# Altium PCB ECG_Main.PcbDoc
Units mm, origin at the board's own origin, x right, y up, seen from the top; angles counter-clockwise.
Board outline 62 x 109.5 mm, 2 copper layers (Top Layer, Bottom Layer); 50 components, 38 nets, 198 pads, 8 vias.
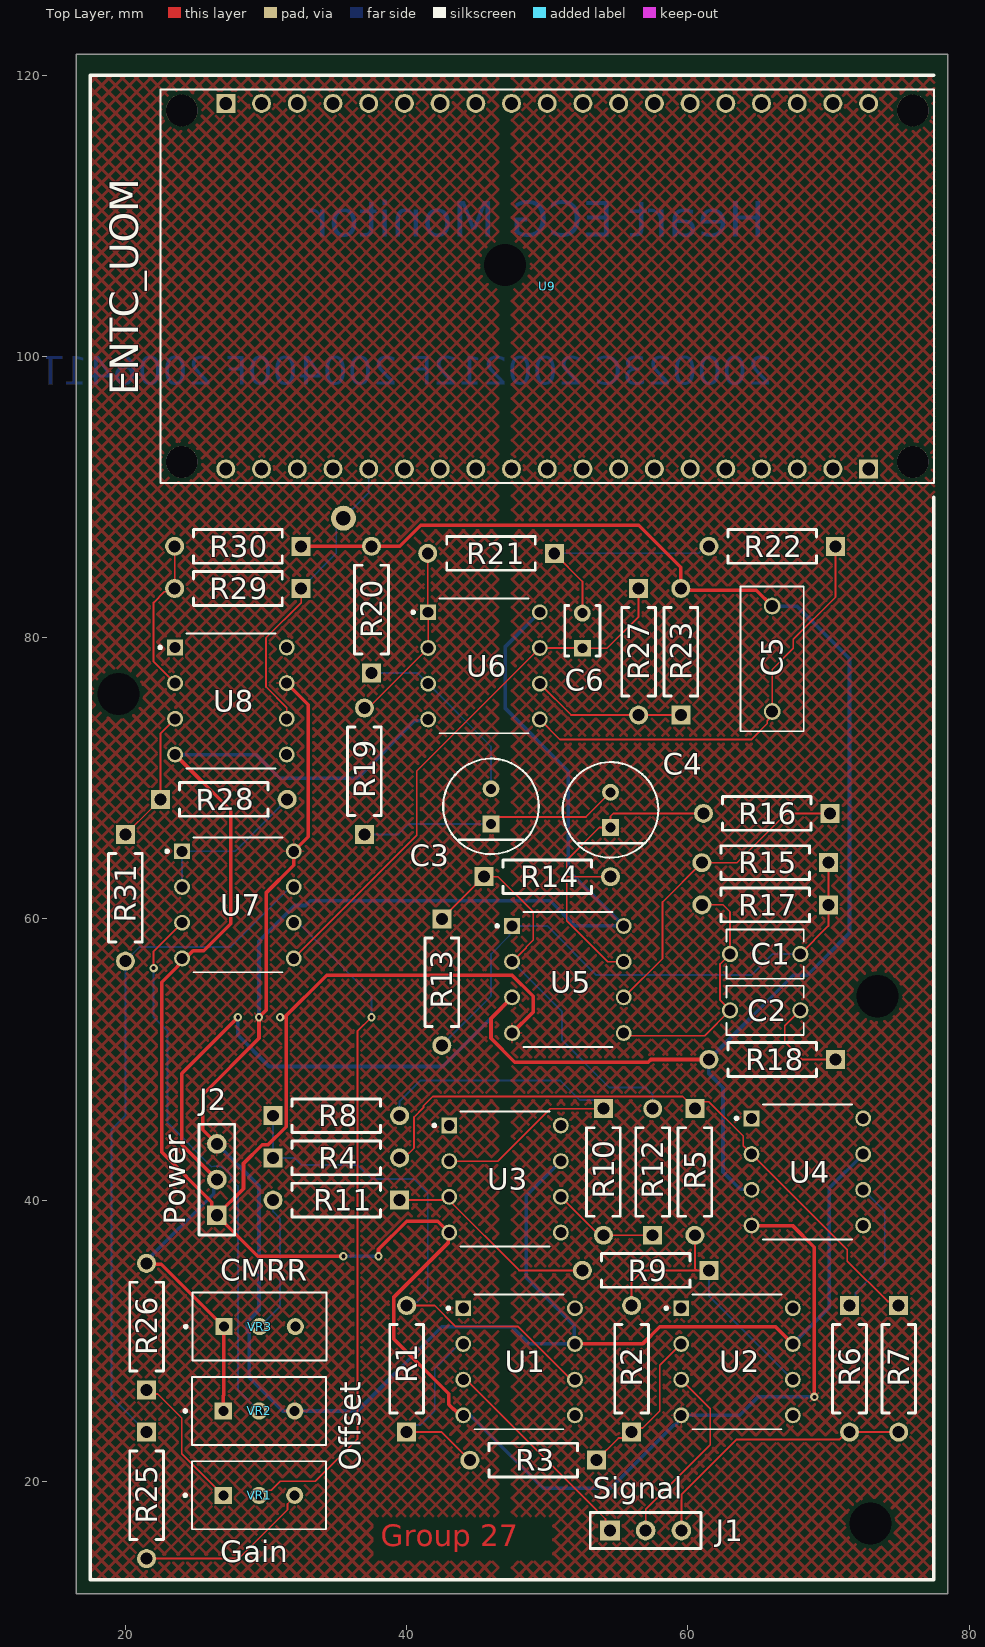
[diagram p0: Top Layer view]
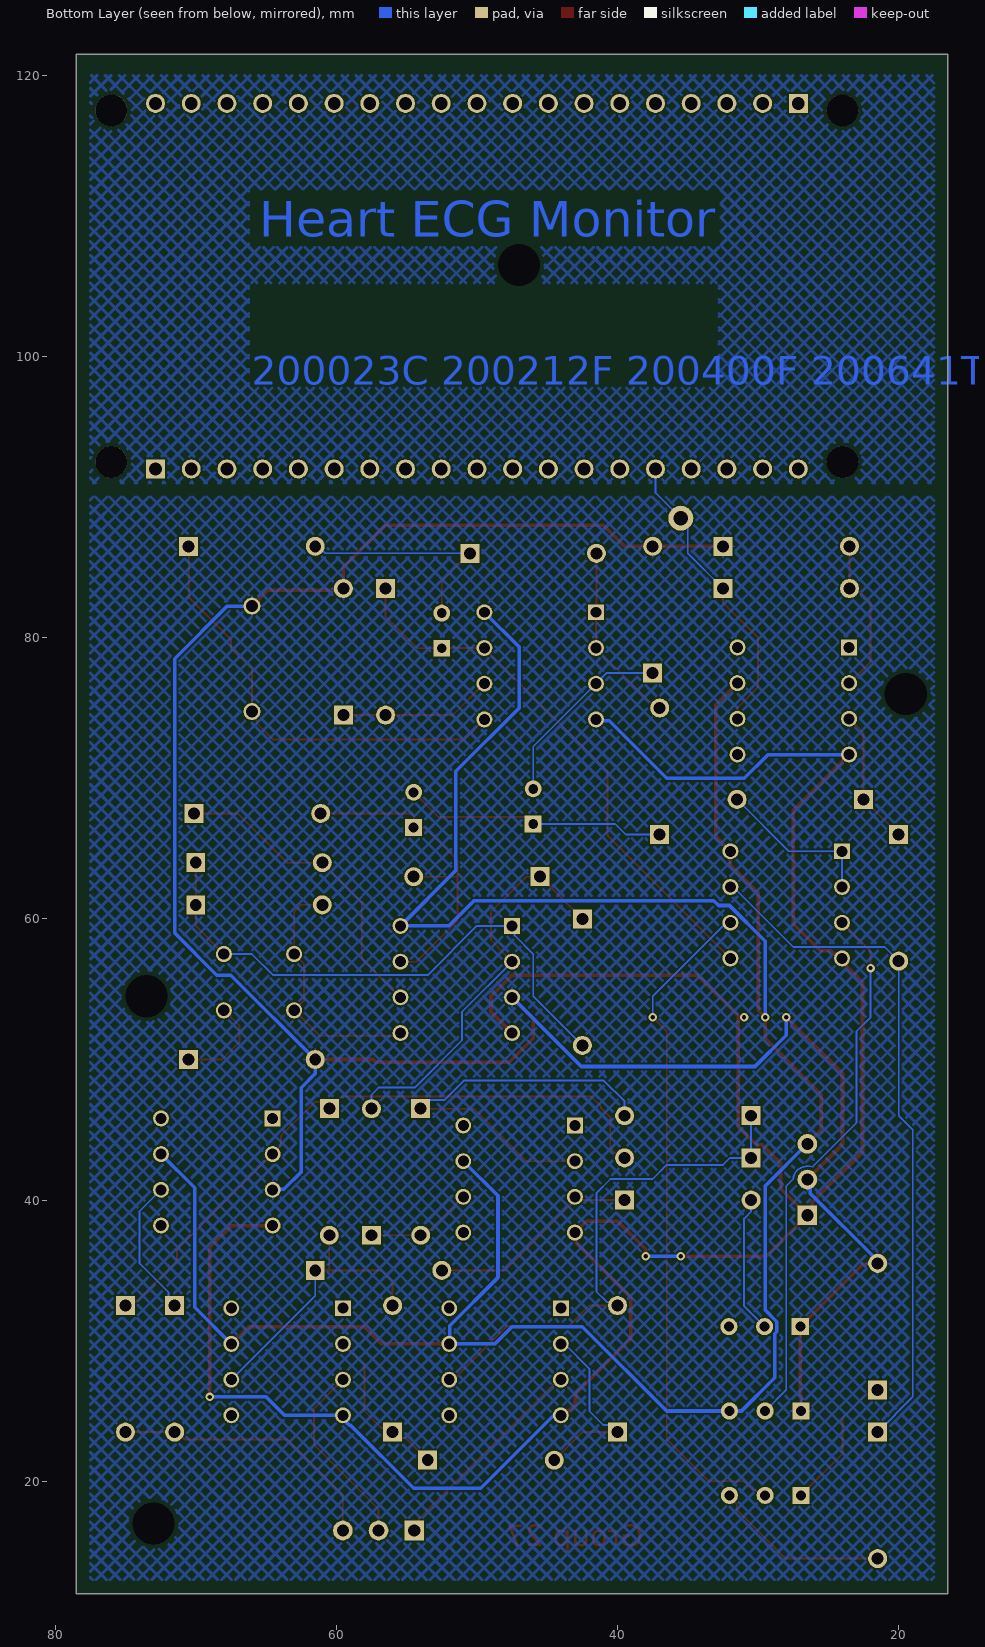
[diagram p1: Bottom Layer view, seen from below]

## Layer stack, top to bottom
Top Solder: solder mask 0.0102, Solder Resist, Dk 3.5
Top Layer: signal copper 0.0356
Dielectric 1: dielectric 0.32, FR-4, Dk 4.8
Bottom Layer: signal copper 0.0356
Bottom Solder: solder mask 0.0102, Solder Resist, Dk 3.5

## Board outline
16.5,12 78.5,12 78.5,121.5 16.5,121.5

## Design rules (kind name [scope] priority, off if disabled: settings)
BoardOutlineClearance [All] p1: gap=0.2 ignorepadtopadclearanceinfootprint=FALSE
Clearance [All] p1: gap=0.127 ignorepadtopadclearanceinfootprint=FALSE except(0.25: Arc-Hole Track-Hole SMDPad-Hole THPad-Hole Via-Hole Fill-Hole Poly-Hole Region-Hole Text-Hole)
ComponentClearance [All] p1: gap=0.127 collisioncheckmode=3 verticalgap=0.127 showdistances=TRUE
DiffPairsRouting [All] p1: maxlimit=0.254 minlimit=0.127 mostfreqgap=0.127 toplayer_minwidth=0.127 toplayer_maxwidth=25.4 toplayer_prefwidth=0.127 bottomlayer_minwidth=0.127 bottomlayer_maxwidth=25.4 bottomlayer_prefwidth=0.127 maxuncoupledlength=12.7
Height [All] p1: minheight=0 maxheight=1816.048 prefheight=12.7
HoleSize [All] p1: absolutevalues=TRUE maxlimit=6.3 minlimit=0.3 maxpercent=80.000 minpercent=20.000
HoleToHoleClearance [All] p1: gap=0.25 allowstackedmicrovias=FALSE
MinimumAnnularRing [All] p1: minimumring=0.076
MinimumSolderMaskSliver [All] p1: minsoldermaskwidth=0
PlaneClearance [All] p1: clearance=0.127
PlaneConnect PlaneConnectPowerPads [InPadClass('PowerPads')] p1: planeconnectstyle=Direct reliefexpansion=0.508 reliefentries=4 reliefconductorwidth=0.254 reliefairgap=0.254
PlaneConnect [All] p2: pad.planeconnectstyle=Relief pad.reliefexpansion=0.3 pad.reliefentries=4 pad.reliefconductorwidth=0.127 pad.reliefairgap=0.127 via.planeconnectstyle=Direct via.reliefexpansion=0.3 via.reliefentries=4 via.reliefconductorwidth=0.127 via.reliefairgap=0.127
PolygonConnect PolygonConnectPowerPads [All vs (InPadClass('PowerPads'))] p1: connectstyle=Direct reliefconductorwidth=0.254 reliefentries=4 polygonreliefangle="90 Angle" airgapwidth=0.254
PolygonConnect [All] p2: thpad.connectstyle=Relief thpad.reliefconductorwidth=0.127 thpad.reliefentries=4 thpad.polygonreliefangle="90 Angle" thpad.airgapwidth=0.127 smdpad.connectstyle=Relief smdpad.reliefconductorwidth=0.127 smdpad.reliefentries=4 smdpad.polygonreliefangle="90 Angle" smdpad.airgapwidth=0.127 via.connectstyle=Relief via.reliefconductorwidth=0.127 via.reliefentries=4 via.polygonreliefangle="45 Angle" via.airgapwidth=0.127
RoutingVias [All] p1: holewidth=0.3 width=0.6 viastyle="Through Hole" minholewidth=0.3 minwidth=0.6 maxholewidth=0.6 maxwidth=6.6
SilkToSilkClearance [All] p1: silktosilkclearance=0
SilkToSolderMaskClearance [IsPad] p1: minsilkscreentomaskgap=0.127 clearancetoexposedcopper=TRUE
SolderMaskExpansion [All] p1: expansion=0.075 istentingtop=FALSE
Width Width_1 [InNet('+6V') or InNet('-6V') or InNet('GND')] p1: maxlimit=0.254 minlimit=0.254 preferedwidth=0.254
Width [All] p2: maxlimit=25.4 minlimit=0.127 preferedwidth=0.127 minimp=50.000000 maximp=50.000000 favimp=50.000000
20 further rules are at their usual default settings.

## Components (designator, comment, footprint, x,y, rotation, side; value= is the part's Value field where it differs from the comment)
C1 "0.68uF" CAPRB500W50L550T350H600 65.5,57.5 r180 top
C2 "0.68uF" CAPRB500W50L550T350H600 65.5,53.5 r0 top
C3 "100uF" FP-RAD-TH-D_6_3_0_5-L_11-MFG 46,68 r90 top
C4 "100uF" FP-RAD-TH-D_6_3_0_5-L_11-MFG 54.5,67.75 r90 top
C5 "68nF" CAPRR750W60L1030T450H750 66,78.5 r90 top
C6 "47nF" FP-RCE0DB-MFG 52.5,80.5 r90 top
J1 "SIGNAL_IN" SMTC-SLW-103-01-X-S 54.46,16.5 r0 top
J2 "POWER_IN" SMTC-SLW-103-01-X-S 26.5,38.92 r90 top
R1 "100k" RESA60-630X240 40,28 r90 top
R2 "100k" RESA60-630X240 56,28 r90 top
R3 "10k" RESA60-630X240 49,21.5 r180 top
R4 "56k" RESA60-630X240 35,43 r0 top
R5 "56k" RESA60-630X240 60.5,42 r270 top
R6 "3M" RESA60-630X240 71.5,28 r270 top
R7 "3M" RESA60-630X240 75,28 r270 top
R8 "8.2k" RESA60-630X240 35,46 r0 top
R9 "8.2k" RESA60-630X240 57,35 r180 top
R10 "43k" RESA60-630X240 54,42 r270 top
R11 "33k" RESA60-630X240 35,40 r180 top
R12 "6.8k" RESA60-630X240 57.5,42 r90 top
R13 "47k" RESA60-630X240 42.5,55.5 r270 top
R14 "8.2k" RESA60-630X240 50,63 r0 top
R15 "100k" RESA60-630X240 65.5,64 r180 top
R16 "200k" RESA60-630X240 65.612,67.5 r180 top
R17 "4.7k" RESA60-630X240 65.5,61 r180 top
R18 "4.7k" RESA60-630X240 66,50 r180 top
R19 "15k" RESA60-630X240 37,70.5 r90 top
R20 "33k" RESA60-630X240 37.5,82 r90 top
R21 "24k" RESA60-630X240 46,86 r180 top
R22 "15k" RESA60-630X240 66,86.5 r180 top
R23 "10k" RESA60-630X240 59.5,79 r90 top
R25 "5.1k" RESA60-630X240 21.5,19 r270 top
R26 "5.1k" RESA60-630X240 21.5,31 r90 top
R27 "10k" RESA60-630X240 56.5,79 r270 top
R28 "10k" RESA60-630X240 27,68.5 r0 top
R29 "10k" RESA60-630X240 28,83.5 r180 top
R30 "10k" RESA60-630X240 28,86.5 r180 top
R31 "10k" RESA60-630X240 20,61.5 r270 top
U1 "OP07CP" DIP794W45P254L959H508Q8 48,28.5 r0 top
U2 "OP07CP" DIP794W45P254L959H508Q8 63.5,28.5 r0 top
U3 "OP07CP" DIP794W45P254L959H508Q8 47,41.5 r0 top
U4 "OP07CP" DIP794W45P254L959H508Q8 68.5,42 r0 top
U5 "TL072BCP" DIP794W45P254L959H508Q8 51.47,55.69 r0 top
U6 "TL072BCP" DIP794W45P254L959H508Q8 45.5,78 r0 top
U7 "TL072BCP" DIP794W45P254L959H508Q8 28,61 r0 top
U8 "OP07CP" DIP794W45P254L959H508Q8 27.5,75.5 r0 top
U9 "ESP32_NODEMCU" MODULE_ESP32_NODEMCU 50,105 r90 top
VR1 "100k" TRIM_3296W-OT1-103 29.5,19 r0 top
VR2 "100k" TRIM_3296W-OT1-103 29.5,25 r0 top
VR3 "20k" TRIM_3296W-OT1-103 29.54,31 r0 top

## Footprints (in the part's own frame and the unit in brackets; to place one, negate y for a bottom-side part, rotate by r counter-clockwise, add the part's x,y. Pads: shape width x height; smd on the part's side, far side on the other; paste and mask are expansions set on the pad)
CAPRB500W50L550T350H600 [mm]
  round 1.15 hole 0.8: 1(-2.5,0) 2(2.5,0)
  silkscreen extent -2.75,-1.75 2.75,1.75, body extent -2.75,-1.75 2.75,1.75, height 3
CAPRR750W60L1030T450H750 [mm]
  round 1.2 hole 0.85: 1(-3.75,0) 2(3.75,0)
  silkscreen extent -5.15,-2.25 5.15,2.25, body extent -5.15,-2.25 5.15,2.25, height 8.5
DIP794W45P254L959H508Q8 [mm]
  rect 1.13x1.13 hole 0.78: 1(-3.97,3.81)
  round 1.13 hole 0.78: 2(-3.97,1.27) 3(-3.97,-1.27) 4(-3.97,-3.81) 5(3.97,-3.81) 6(3.97,-1.27) 7(3.97,1.27) 8(3.97,3.81)
  silkscreen extent -5.13,-4.79 3.17,4.79, body extent -3.94,-4.79 3.94,4.79, height 5.08
FP-RAD-TH-D_6_3_0_5-L_11-MFG [mm]
  rect 1.2x1.2 hole 0.7 paste-1000 mask+0: 1(-1.25,0)
  round 1.2 hole 0.7 paste-1000 mask+0: 2(1.25,0)
  silkscreen extent -3.4,-3.4 3.4,3.4, body extent -3.5,-3.5 3.5,3.5, height 0.25
FP-RCE0DB-MFG [mm]
  rect 1.2x1.2 hole 0.7 paste-1000 mask+0: 1(-1.25,0)
  round 1.2 hole 0.7 paste-1000 mask+0: 2(1.25,0)
  silkscreen extent -1.8,-1.25 1.8,1.25, body extent -1.95,-1.35 1.95,1.35, height 0.25
MODULE_ESP32_NODEMCU [mm]
  rect 1.35x1.35 hole 0.9: J4_1(13,22.86) J5_1(-13,-22.86)
  round 1.35 hole 0.9: J4_2(13,20.32) J4_3(13,17.78) J4_4(13,15.24) J4_5(13,12.7) J4_6(13,10.16) J4_7(13,7.62) J4_8(13,5.08) J4_9(13,2.54) J4_10(13,0) J4_11(13,-2.54) J4_12(13,-5.08) J4_13(13,-7.62) J4_14(13,-10.16) J4_15(13,-12.7) J4_16(13,-15.24) J4_17(13,-17.78) J4_18(13,-20.32) J4_19(13,-22.86) J5_2(-13,-20.32) J5_3(-13,-17.78) J5_4(-13,-15.24) J5_5(-13,-12.7) J5_6(-13,-10.16) J5_7(-13,-7.62) J5_8(-13,-5.08) J5_9(-13,-2.54) J5_10(-13,0) J5_11(-13,2.54) J5_12(-13,5.08) J5_13(-13,7.62) J5_14(-13,10.16) J5_15(-13,12.7) J5_16(-13,15.24) J5_17(-13,17.78) J5_18(-13,20.32) J5_19(-13,22.86)
  round 2.25 hole 2.25 unplated: ""(-12.5,26) ""(-12.5,-26) ""(12.5,26) ""(12.5,-26)
  silkscreen extent -14,-27.5 14,27.5
RESA60-630X240 [mm] "Axial Resistor, 2-Leads, Dia 2.4mm, Body Length 6.3mm"
  rect 1.35x1.35 hole 0.85: 1(-4.5,0)
  round 1.35 hole 0.85: 2(4.5,0)
  silkscreen extent -3.15,-1.2 3.15,1.2, body extent -4.77,-1.19 4.77,1.2, height 2.4
SMTC-SLW-103-01-X-S [mm] "Low Profile Socket Strip, 1x3 Pins, Vertical, 2.54mm Pitch, Female"
  rect 1.4x1.4 hole 0.86: 1(0,0)
  round 1.4 hole 0.86: 2(2.54,0) 3(5.08,0)
  silkscreen extent -1.4,-1.27 6.48,1.27, body extent -1.27,-1.27 6.35,1.27, height 4.57
TRIM_3296W-OT1-103 [mm]
  rect 1.218x1.218 hole 0.71: 1(-2.54,0)
  round 1.218 hole 0.71: 2(0,0) 3(2.54,0)
  silkscreen extent -5.35,-2.41 4.76,2.42, body extent -4.76,-2.41 4.76,2.42, height 11.55

## Part data
C1 C2: library part FA26NP02J472JNU06, Package=None, Availability=Unavailable, MF="{'manufacturer': u'TDK'}", MP=FA26NP02J472JNU06, Price=None
C3 C4: library part CMP-001-00083-1, "Cap Aluminum Lytic 100uF 25V 20% (6.3 X 11.2mm) Radial 2.5mm 130mA 1000h 105°C Ammo Pack"
C5: library part ECQE2683JF, Package=None, Availability=Unavailable, MF="{'manufacturer': u'Panasonic'}", MP=ECQE2683JF, Price=None
C6: library part CMP-001-00084-1, "Cap Ceramic 470pF 50V C0G 5% Radial 2.5mm 125°C Ammo Pack"
J1 J2: library part CMP-1023-00128-1, "Low Profile Socket Strips, Through-hole, Vertical, -55 to 125 degC, 2.54 mm Pitch, 3-Pin, Female, RoHS", Manufacturer=Samtec, PartNumber=SLW-103-01-G-S, Temperature Range="-55 to 125 degC", ComponentLink1Description="Manufacturer URL", ComponentLink1URL=http://www.samtec.com, ComponentLink2Description=Datasheet, ComponentLink2URL=http://www.samtec.com/documents/webfiles/pdf/SLW.PDF, ComponentLink3Description="Package Specification", ComponentLink3URL=http://www.samtec.com/documents/webfiles/cpdf/SLW-1XX-01-X-X-MKT.pdf, DatasheetVersion=F-214, Mounting Technology=Through-hole, Orientation=Vertical, PackageDescription="Low Profile Socket Strip", PackageReference=SLW-103-01-X-S, PackageVersion="X, 9/1987", Pitch="2.54 mm", RoHS=True
R1 R2: library part CMP-009-00045-4, "Axial Resistor, 100 KOhm, +/- 1%, 0.25 W, -55 to 155 degC, 2-Pin THD, RoHS, Bulk", Case/Package=Axial, Manufacturer=Yageo, Max Operating Temperature=155°C, Min Operating Temperature=-55°C, Package Description="2-Pin Axial Lead, Dia 2.4 mm, Body Length 6.3 mm", Package Quantity=200, Package Reference=MFR-25, Power=250mW, Tolerance=1%, Voltage Rating=250V, Datasheet URL=http://www.yageo.com/documents/recent/Yageo%20LR_MFR_2013.pdf, Datasheet Version=Apr-13, Manufacturer URL=http://www.yageo.com/, Mounting Technology=TH, Packaging=Bulk, RoHS Compliant=True
R3 R21 R22 R23 R25 R26 R27 R28 R29 R30 R31: library part CMP-009-00047-4, "Axial Resistor, 10 KOhm, +/- 1%, 0.25 W, -55 to 155 degC, 2-Pin THD, RoHS, Bulk", Case/Package=Axial, Manufacturer=Yageo, Max Operating Temperature=155°C, Min Operating Temperature=-55°C, Package Description="2-Pin Axial Lead, Dia 2.4 mm, Body Length 6.3 mm", Package Quantity=200, Package Reference=MFR-25, Power=250mW, Tolerance=1%, Voltage Rating=250V, Datasheet URL=http://www.yageo.com/documents/recent/Yageo%20LR_MFR_2013.pdf, Datasheet Version=Apr-13, Manufacturer URL=http://www.yageo.com/, Mounting Technology=TH, Packaging=Bulk, RoHS Compliant=True
R4 R5 R10 R11: library part CMP-009-00057-4, "Axial Resistor, 47.5 KOhm, +/- 1%, 0.25 W, -55 to 155 degC, 2-Pin THD, RoHS, Bulk", Case/Package=Axial, Manufacturer=Yageo, Max Operating Temperature=155°C, Min Operating Temperature=-55°C, Package Description="2-Pin Axial Lead, Dia 2.4 mm, Body Length 6.3 mm", Package Quantity=200, Package Reference=MFR-25, Power=250mW, Tolerance=1%, Voltage Rating=250V, Datasheet URL=http://www.yageo.com/documents/recent/Yageo%20LR_MFR_2013.pdf, Datasheet Version=Apr-13, Manufacturer URL=http://www.yageo.com/, Mounting Technology=TH, Packaging=Bulk, RoHS Compliant=True
R6 R7: library part CMP-009-00049-4, "Axial Resistor, 1 MOhm, +/- 1%, 250 mW, -55 to 155 degC, 2-Pin THD, RoHS, Bulk", Case/Package=Axial, Manufacturer=Yageo, Max Operating Temperature=155°C, Min Operating Temperature=-55°C, Package Description="2-Pin Axial Lead, Dia 2.4 mm, Body Length 6.3 mm", Package Quantity=200, Package Reference=MFR-25, Power=250mW, Tolerance=1%, Voltage Rating=250V, Datasheet URL=http://www.yageo.com/documents/recent/Yageo%20LR_MFR_2013.pdf, Datasheet Version=Apr-13, Manufacturer URL=http://www.yageo.com/, Mounting Technology=TH, Packaging=Bulk, RoHS Compliant=True
R8 R9: library part CMP-009-00059-4, "Axial Resistor, 4.75 KOhm, +/- 1%, 0.25 W, -55 to 155 degC, 2-Pin THD, RoHS, Bulk", Case/Package=Axial, Manufacturer=Yageo, Max Operating Temperature=155°C, Min Operating Temperature=-55°C, Package Description="2-Pin Axial Lead, Dia 2.4 mm, Body Length 6.3 mm", Package Quantity=200, Package Reference=MFR-25, Power=250mW, Tolerance=1%, Voltage Rating=250V, Composition=MetalFilm, Datasheet URL=http://www.yageo.com/documents/recent/Yageo%20LR_MFR_2013.pdf, Datasheet Version=Apr-13, Manufacturer URL=http://www.yageo.com/, Mounting Technology=TH, Packaging=Bulk, RoHS Compliant=True
R12 R13 R14 R15 R16 R17 R18 R19 R20: library part CMP-009-00058-4, "Axial Resistor, 47.5 Ohm, +/- 1%, 0.25 W, -55 to 155 degC, 2-Pin THD, RoHS, Bulk", Case/Package=Axial, Manufacturer=Yageo, Max Operating Temperature=155°C, Min Operating Temperature=-55°C, Package Description="2-Pin Axial Lead, Dia 2.4 mm, Body Length 6.3 mm", Package Quantity=200, Package Reference=MFR-25, Power=250mW, Tolerance=1%, Voltage Rating=250V, Datasheet URL=http://www.yageo.com/documents/recent/Yageo%20LR_MFR_2013.pdf, Datasheet Version=Apr-13, Manufacturer URL=http://www.yageo.com/, Mounting Technology=TH, Packaging=Bulk, RoHS Compliant=True
U1 U2 U3 U4 U8 U9: Package=None, Availability=Unavailable, Price=None
  U1 U2 U3 U4 U8: MF="{'manufacturer': u'Texas Instruments'}", MP=OP07CP
  U9: MF="{'manufacturer': u'Espressif Systems'}", MP=ESP32_NODEMCU
U5 U6 U7: library part CMP-005-000000-1, "Dual low-noise JFET-input low offset operational amplifier 8-PDIP 0 to 70", Package="PDIP-8 Texas", Availability=Warning, Check_prices=https://www.snapeda.com/parts/TL072BCP/Texas%20Instruments/view-part/511536/?ref=eda, Component Type=Standard, Design Item ID=TL072BCP, MF="Texas Instruments", MP=TL072BCP, Pin Count=8, Price=None, Purchase-URL=https://pricing.snapeda.com/search/part/TL072BCP/?ref=eda, SnapEDA_Link=https://www.snapeda.com/parts/TL072BCP/Texas%20Instruments/view-part/511536/?ref=snap, Source=TL072BCP.SchLib
VR1 VR2 VR3: library part 3296W-OT1-103, "Res Cermet Trimmer 500K Ohm 10% 0.5W 25(Elec)Turn 2.19mm (9.53 X 4.83 X 11.55mm) Pin Thru-Hole Tube", Package=None, Availability=Unavailable, MF="{'manufacturer': u'Bourns'}", MP=3296W-OT1-103, Price=None

## Free pads (board coordinates)
  round 1.524 hole 3 unplated: 10(73,17) 11(73.5,54.5) 13(19.5,76) 15(47,106.5)
  round 1.778 hole 1.016: 16(35.5,88.5)

## Via types
v1: diameter 0.6, hole 0.3, Top Layer to Bottom Layer, 8 vias

## Nets (pads, with @x,y where several pads share a name; then routed paths per layer and width w, separated by ;. In a path a pad name is that pad's centre, name@x,y a point inside that pad or via, vN(x,y) a via of type N, cw(c..) or ccw(c..) an arc to the next point about the centre after c; other vN are vias at no path point)
+6V: J2.3 U1.7 U2.7 U3.7 U4.7 U5.8 U6.8 U7.8 U8.7 VR2.3 | length 190
  Top Layer w0.254: J2.3 25.5,45 25.5,47.5 29.5,51.5 v1(29.5,53) 30,53.5 30,61.84 31.97,63.81 U7.8 33,65.84 33,75.24 U8.7 ; U1.7 56.77,29.77 58,31 66.24,31 U2.7
  Bottom Layer w0.254: J2.3 29.5,41 29.5,32.18 28.677,31.357 28.677,30.643 28.817,30.502 28.817,27.367 31.184,25 VR2.3 36.5,25 42.5,31 47.5,31 48.73,29.77 U1.7 51.934,29.806 51.934,31.066 48.5,34.5 48.5,40.3 U3.7 ; v1(29.5,53) 29.5,58.418 32.033,60.951 32.809,60.951 33.152,61.294 50.206,61.294 52,59.5 U5.8 51.5,63.44 51.5,70.5 47,75 47,79.34 U6.8 ; U2.7 70.071,32.371 70.071,40.871 U4.7
-6V: J2.1 U1.4 U2.4 U3.4 U4.4 U5.4 U6.4 U7.4 U8.4 | length 180.5
  Top Layer w0.254: U8.4 27.5,67.72 27.5,59.66 25.571,57.731 24.808,57.731 22.577,55.5 22.577,43.423 26.148,39.852 26.148,39.272 J2.1 ; v1(31,53) 31.418,53 31.429,52.989 31.429,45.22 30.138,43.929 29.72,43.929 28.396,42.606 28.396,40.816 J2.1 ; 31.307,53 34.307,56 47.5,56 49,54.5 49,53.38 U5.4 ; v1(35.5,36) 29.42,36 J2.1 ; v1(38,36) 38,36.5 40,38.5 42.22,38.5 U3.4 42.945,37.605 42.945,36.945 39.071,33.071 39.071,30.149 42.992,26.228 42.992,25.465 43.319,25.138 43.345,25.138 43.793,24.69 U1.4 ; U4.4 67.447,38.19 69,36.637 v1(69,26)
  Bottom Layer w0.254: U8.4 29.289,71.69 30.979,70 36.5,70 40.584,74.084 41.424,74.084 U6.4 ; v1(35.5,36) v1(38,36) ; U1.4 44.53,24.69 49.72,19.5 54.5,19.5 59,24 59.093,24 59.241,24.149 59.241,24.164 59.53,24.453 U2.4 63.682,24.69 64.992,26 v1(69,26)
AMP_IN: C6.1 R27.1 U6.7 U7.5 | length 39.3
  Top Layer w0.127: U7.5 40.72,65.94 40.72,70.52 U6.7 52.48,79.27 C6.1 54.25,79.25 56.5,81.5 R27.1
ECG_OUT: pad.16 R29.1 U8.6 U9.J5_15 | length 21.4
  Top Layer w0.127: U8.6 31.47,75.03 30,76.5 30,80 32.5,82.5 R29.1
  Bottom Layer w0.127: R29.1 35,86 35,88 37.3,90.3 U9.J5_15
GND: C5.2 J2.2 R18.2 R20.2 R23.2 R26.2 R30.1 U4.3 U5.3 VR2.1 VR3.1 | length 168.2
  Top Layer w0.254: R26.2 21.556,35.444 22.556,35.444 VR3.1 27,26.117 26.942,26.059 26.942,25.018 VR2.1 ; J2.2 24,43.96 24,49 v1(28,53) ; R30.1 36,86.5 R20.2 39.5,86.5 41,88 56.5,88 59.5,85 R23.2 59.625,83.375 64.875,83.375 C5.2 ; U5.3 46,52.92 46,51.5 47.693,49.807 57.186,49.807 57.379,50 R18.2
  Bottom Layer w0.254: R26.2 21.5,35.679 26.281,40.46 26.281,41.241 J2.2 ; v1(28,53) 28,51.717 30.217,49.5 42.58,49.5 U5.3 ; R23.2 R23.2@59.797,83.5 ; U4.3 64.495,40.765 63.735,40.765 62.5,42 62.5,48 61.5,49 R18.2 67.5,56 68.5,56 71.5,59 71.5,78.5 67.75,82.25 C5.2
HPF_IN: C4.1 R14.2 R16.2 U5.7 | length 24.2
  Top Layer w0.127: R14.2 51.383,63 ; U5.7 54.306,56.96 51.383,59.883 51.383,63 ; R16.2 54.709,67.5 54.5,67.291 C4.1 53.709,66.5 51.383,64.173 51.383,63
IN1: J1.1 U1.3 | length 15.2
  Top Layer w0.127: U1.3 44.23,27.23 52.958,18.502 54.144,17.316 54.144,16.816 J1.1
IN2: J1.2 U2.3 | length 13.5
  Top Layer w0.127: J1.2 57,18 61.591,22.591 61.591,25.169 U2.3
IN3: J1.3 R6.2 R7.2 | length 19.8
  Top Layer w0.127: J1.3 59.54,19.04 63.48,22.98 70.796,22.98 71.316,23.5 R6.2 R7.2
LPF_IN: R19.2 R21.2 U6.1 U6.2 | length 13
  Top Layer w0.127: R19.2 37.26,75 U6.2 U6.1 41.5,81.84 R21.2
NetC1_1: C1.1 R13.2 R15.1 R17.1 U5.1 | length 40.5
  Top Layer w0.127: C1.1 70,59.5 R15.1
  Bottom Layer w0.127: R13.2 46,54.5 46,57.5 47.319,58.819 47.319,59.319 U5.1 50,59.5 53.5,56 64.5,56 66,57.5 C1.1
NetC1_2: C1.2 C2.1 R17.2 U5.5 | length 18.2
  Top Layer w0.127: U5.5 55.63,51.69 61.19,51.69 C2.1 62.293,54.207 62.293,56.793 C1.2 63,60.5 62.5,61 R17.2
NetC2_2: C2.2 R18.1 | length 6.8
  Top Layer w0.127: C2.2 66.886,52.386 66.886,51.248 68.135,50 R18.1
NetC3_1: C3.1 C4.2 R19.1 | length 18.7
  Top Layer w0.127: C3.1 46.5,67.25 52.75,67.25 C4.2
  Bottom Layer w0.127: R19.1 39.412,66 40.163,66.75 C3.1
NetC3_2: C3.2 R20.1 U6.3 | length 13.7
  Bottom Layer w0.127: R20.1 40.76,77.5 U6.3 46,72.26 C3.2
NetC5_1: C5.1 R22.1 U6.5 | length 31.9
  Top Layer w0.127: U6.5 50.91,72.75 64.5,72.75 65.646,73.896 65.646,74.106 C5.1@66,74.46 ; C5.1 66,77.739 67.5,79.239 67.5,79.889 70.5,82.889 R22.1
  Bottom Layer w0.127: C5.1@66,74.46 C5.1
NetC6_2: C6.2 R21.1 R22.2 | length 16.3
  Top Layer w0.127: R21.1 52.5,84 C6.2
  Bottom Layer w0.127: R21.1 60.776,86 61.276,86.5 R22.2
NetR1_1: R1.1 R3.2 U1.2 | length 13.7
  Top Layer w0.127: R1.1 42.5,23.5 R3.2
  Bottom Layer w0.127: R1.1 40.502,24.002 41.002,24.002 42,25 42,28 43.77,29.77 U1.2
NetR1_2: R1.2 R4.1 R8.1 U1.6 | length 39.7
  Top Layer w0.127: R4.1 R4.1@31.06,43.56 ; R8.1 R8.1@31.06,45.44 ; R1.2 42,32.5 43.5,31 47.929,31 51.699,27.23 U1.6
  Bottom Layer w0.127: R8.1 R4.1 32,43 32.5,42.5 36.5,42.5 37.5,41.5 40.5,41.5 41.5,40.5 41.5,33.5 40.734,32.734 40.234,32.734 R1.2
NetR2_1: R2.1 R3.1 U2.2 | length 10.7
  Top Layer w0.127: R3.1 55.071,23.071 R2.1@55.571,23.071 ; R2.1 56.291,23.791 56.791,23.791 58,25 58,28.24 U2.2
NetR2_2: R2.2 R5.2 R9.1 U2.6 | length 20.3
  Top Layer w0.127: R2.2 56,34.18 56.82,35 60.635,35 ; R5.2 60.5,35.135 60.635,35 ; R9.1 60.635,35
  Bottom Layer w0.127: R9.1 61.5,33.5 61.5,33.2 U2.6
NetR4_2: R4.2 R5.1 R7.1 U4.2 | length 46.1
  Top Layer w0.127: R4.2 39.821,43 40.522,43.702 40.522,45.903 41.194,46.575 41.194,46.694 41.866,47.366 59.635,47.366 R5.1 61,47 61.5,47 63.943,44.557 63.943,43.857 71.34,36.46 71.34,35.66 74.209,32.791 74.709,32.791 R7.1
NetR6_1: R6.1 U4.6 | length 9.9
  Bottom Layer w0.127: R6.1 71.929,32.929 71.929,33.429 74,35.5 74,39.2 U4.6
NetR8_2: R8.2 R10.1 U3.2 | length 29.5
  Top Layer w0.127: U3.2 46.48,42.77 50.21,46.5 R10.1
  Bottom Layer w0.127: R8.2 39.5,47.025 40.975,48.5 50.941,48.5 52.329,47.112 53.389,47.112 R10.1
NetR9_2: R9.2 R11.1 U3.3 | length 15.4
  Top Layer w0.127: R11.1 42.529,40 42.759,40.23 U3.3 43.03,39.97 48,35 R9.2
NetR11_2: R11.2 VR3.2 | length 10.4
  Top Layer w0.127: VR3.2 VR3.2@29.54,31.295 ; R11.2@30.189,40 R11.2
  Bottom Layer w0.127: VR3.2 31,32.46 31,38.686 30.5,39.186 R11.2
NetR12_2: R12.2 R13.1 R14.1 U5.2 | length 29
  Top Layer w0.127: R13.1 44.888,62.389 R14.1 46.5,63 49,60.5 49,58.5 48.5,58 48.5,57.96 U5.2
  Bottom Layer w0.127: U5.2 51.059,53.401 51.059,51.367 54.426,48 57,48 57.5,47.5 R12.2
NetR15_2: R15.2 R16.1 U5.6 | length 22.4
  Top Layer w0.127: U5.6 58.199,57.179 58.199,61.199 R15.2 63.5,64 67,67.5 R16.1
NetR23_1: R23.1 R27.2 U6.6 | length 11
  Top Layer w0.127: U6.6 51.7,74.5 R27.2 R23.1
NetR25_1: R25.1 R31.2 U7.7 | length 49.1
  Bottom Layer w0.127: R25.1 19,26 19,45 20,46 R31.2 21,58 27.5,58 31.77,62.27 U7.7
NetR25_2: R25.2 VR1.3 | length 12.7
  Top Layer w0.127: R25.2 28.04,14.5 31.525,17.985 31.525,18.384 32.04,18.899 VR1.3
NetR26_1: R26.1 VR1.1 | length 10.1
  Top Layer w0.127: R26.1 21.791,26.209 22.291,26.209 24,24.5 24,21.96 VR1.1
NetR28_1: R28.1 R31.1 U8.3 | length 9.7
  Top Layer w0.127: R31.1 21.888,67.888 R28.1 22.5,73.2 U8.3
NetR28_2: R28.2 U7.1 U7.2 | length 11.5
  Bottom Layer w0.127: U7.2 U7.1 27.81,64.81 R28.2
NetR29_2: R29.2 R30.2 U8.2 | length 11.3
  Top Layer w0.127: R30.2 R29.2 23.266,83.266 22.766,83.266 22,82.5 22,78.3 U8.2
NetU7_3: U7.3 VR2.2 | length 39.1
  Top Layer w0.127: v1(22,56.5) 22,57.7 U7.3
  Bottom Layer w0.127: v1(22,56.5) 22,53 23,52 23,45.5 26.074,42.426 26.125,42.375 cw(c26.437,41.235) 27.138,42.187 cw(c26.609,41.469) 27.501,41.499 28,41 28,26.5 VR2.2
NetU7_6: U7.6 VR1.2 | length 48.3
  Top Layer w0.127: VR1.2 29.795,19 30.155,19.36 30.36,19.36 31,20 33.5,20 36.5,23 36.5,52 v1(37.5,53)
  Bottom Layer w0.127: U7.6 32.241,59.73 32.499,59.473 32.527,59.473 37.5,54.5 v1(37.5,53)
Notch_IN: R10.2 R12.1 U3.6 | length 7.7
  Top Layer w0.127: U3.6 53.7,37.5 R12.1
pads on no net: U1.1 U1.5 U1.8 U2.1 U2.5 U2.8 U3.1 U3.5 U3.8 U4.1 U4.5 U4.8 U8.1 U8.5 U8.8 U9. U9.J4_1 U9.J4_2 U9.J4_3 U9.J4_4 U9.J4_5 U9.J4_6 U9.J4_7 U9.J4_8 U9.J4_9 U9.J4_10 U9.J4_11 U9.J4_12 U9.J4_13 U9.J4_14 U9.J4_15 U9.J4_16 U9.J4_17 U9.J4_18 U9.J4_19 U9.J5_1 U9.J5_2 U9.J5_3 U9.J5_4 U9.J5_5 U9.J5_6 U9.J5_7 U9.J5_8 U9.J5_9 U9.J5_10 U9.J5_11 U9.J5_12 U9.J5_13 U9.J5_14 U9.J5_16 U9.J5_17 U9.J5_18 U9.J5_19 VR3.3

## Polygon pours and split planes (outlines as drawn)
GND on Bottom Layer "GND_L02_P000" (hatched 45Degree grid 0.7 track 0.203, pour order 0): 77.5,13 17.5,13 17.5,90 77.5,90
GND on Bottom Layer "GND_L02_P002" (hatched 45Degree grid 0.7 track 0.203, pour order 2): 17.5,120 77.5,120 77.5,91 17.5,91
-6V on Top Layer "-6V_L01_P005" (hatched 45Degree grid 0.7 track 0.203, pour order 5): 77.5,13 47.5,13 47.5,120 77.5,120
+6V on Top Layer "+6V_L01_P004" (hatched 45Degree grid 0.7 track 0.203, pour order 4): 17.5,13 46.5,13 46.5,120 17.5,120

## Other copper
Top Layer:
  text "Group 27" at 38.16,15.389 h1.52
Bottom Layer:
  text "Heart ECG Monitor" at 65.492,108.508 h2.54
  text "200023C 200212F 200400F 200641T" at 66,98 h2.03

## Silkscreen, mask and mechanical layers (free items; w line width, h text height)
Top Overlay:
  lines w0.254: 77.5,90 77.5,13 17.5,13 17.5,120 77.5,120
  text "ENTC_UOM" at 20.907,97.254 h2.03 r90
  text "Power" at 24.246,38.254 h1.52 r90
  text "CMRR" at 26.754,34.254 h1.52
  text "Offset" at 36.746,20.754 h1.52 r90
  text "Signal" at 53.254,18.762 h1.52
  text "Gain" at 26.754,14.254 h1.52
Mechanical 1:
  lines w0.254: 17,12.5 78,12.5 78,120.5 17,120.5 17,12.5